# Altium PCB opus.PcbDoc
Units mm, origin at the board's own origin, x right, y up, seen from the top; angles counter-clockwise.
Board outline 42.88 x 39.05 mm, 2 copper layers (Top Layer, Bottom Layer), stack 0.976 mm thick; 10 components, 8 nets, 26 pads, 0 vias.
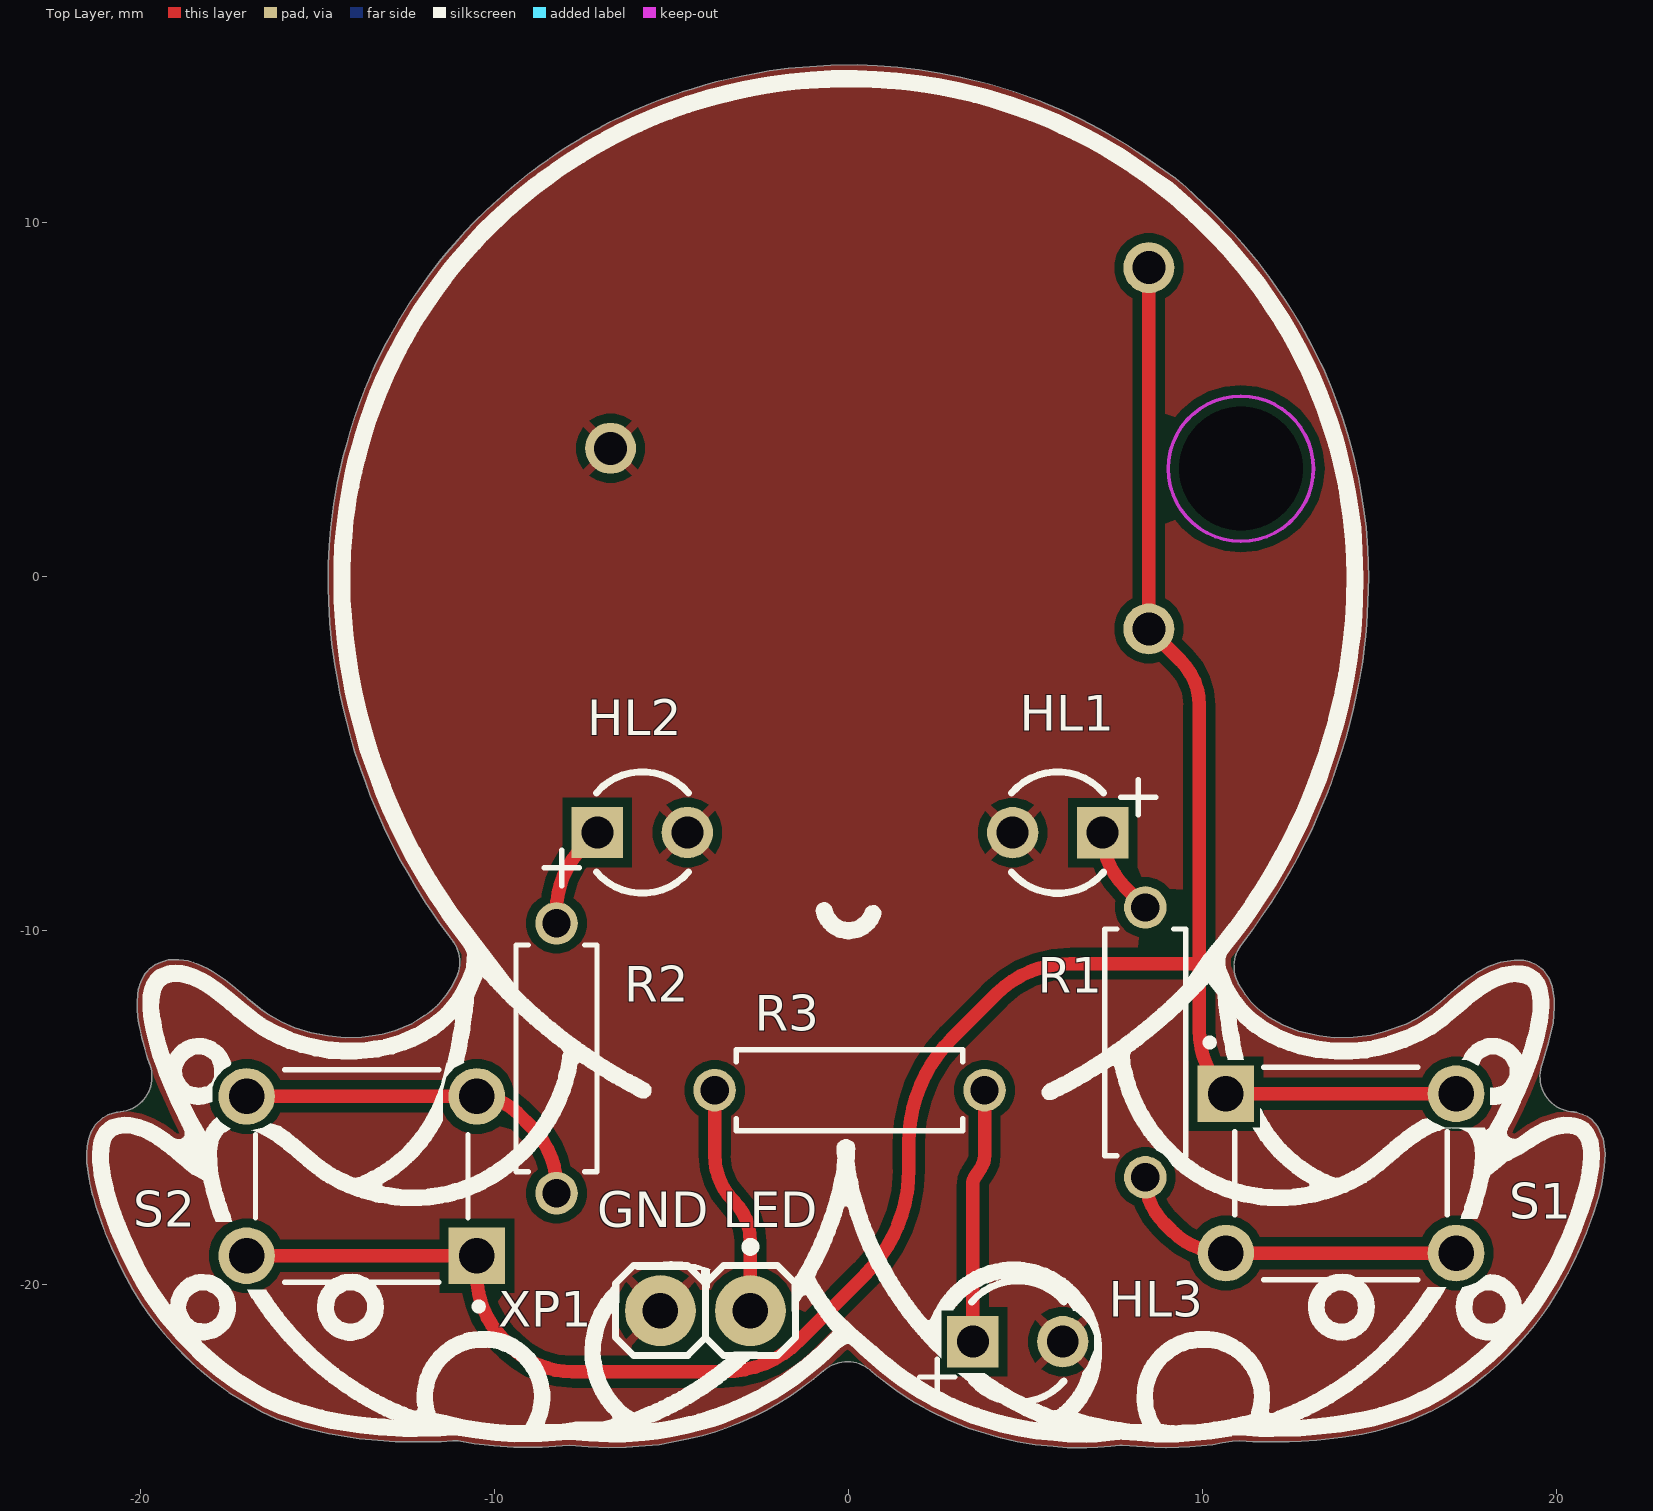
[diagram p0: Top Layer view]
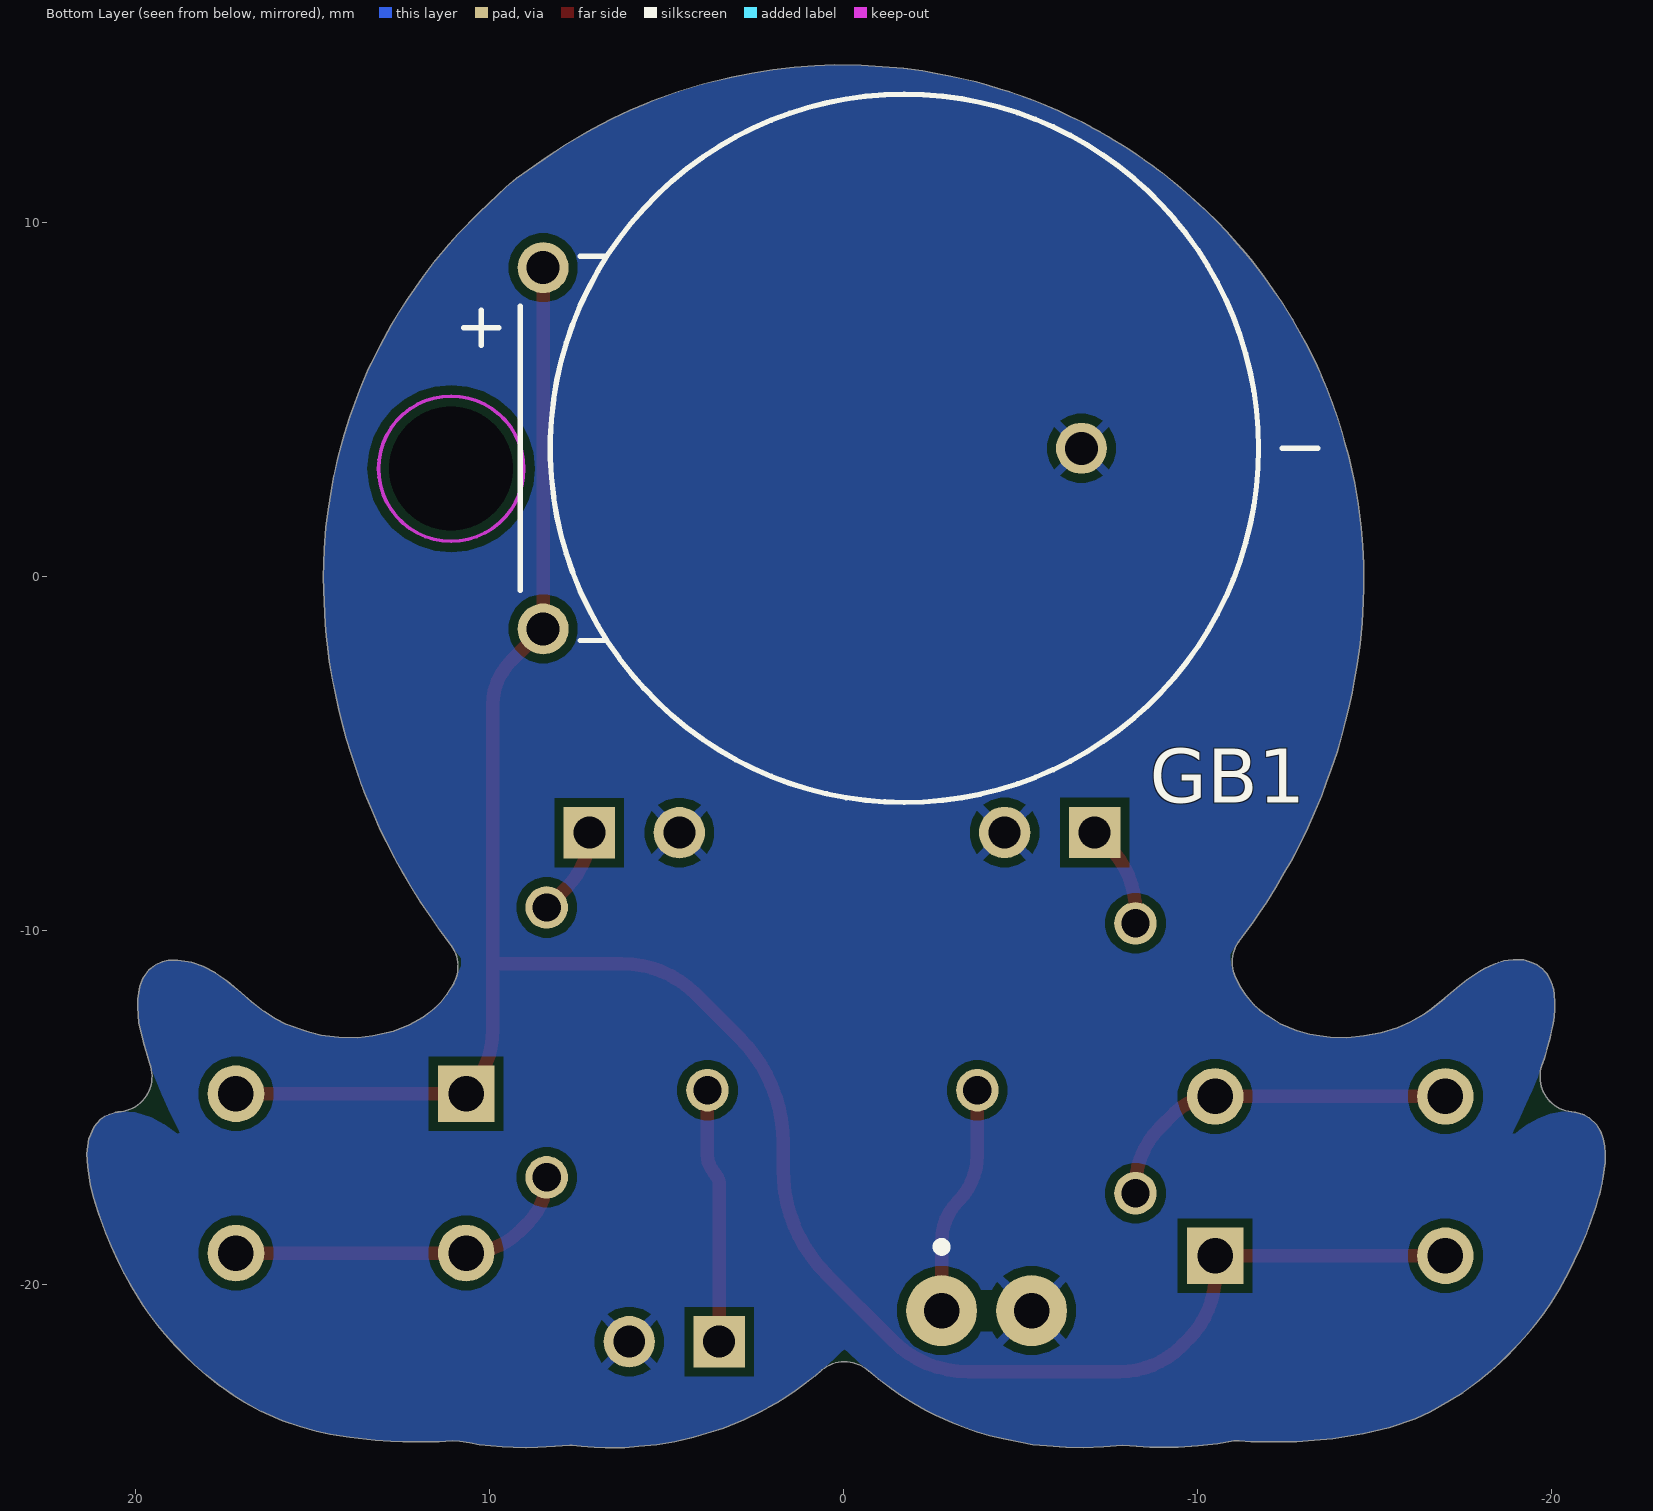
[diagram p1: Bottom Layer view, seen from below]

## Layer stack, top to bottom
Top Solder: solder mask 0.0102, Solder Resist, Dk 3.5
Top Layer: signal copper 0.018
Dielectric 1: dielectric 0.94, FR-4, Dk 4.8
Bottom Layer: signal copper 0.018
Bottom Solder: solder mask 0.0102, Solder Resist, Dk 3.5

## Board outline
395 vertices, not listed, extent -21.514,-24.6 21.362,14.454

## Design rules (kind name [scope] priority, off if disabled: settings)
Clearance [All] p1: gap=0.25 ignorepadtopadclearanceinfootprint=FALSE
HoleSize [All] p1: absolutevalues=TRUE maxlimit=4 minlimit=0.025 maxpercent=80.000 minpercent=20.000
PolygonConnect [All] p1: connectstyle=Relief reliefconductorwidth=0.25 reliefentries=4 polygonreliefangle="90 Angle" conductorbypadedge=TRUE mindistance=0.381 enablemindistance=FALSE airgapwidth=0.25
RoutingVias [All] p1: holewidth=0.711 width=1.27 viastyle="Through Hole" minholewidth=0.711 minwidth=1.27 maxholewidth=0.711 maxwidth=1.27
SilkToSilkClearance [All] p1: silktosilkclearance=0.02
SilkToSolderMaskClearance [IsPad] p1: minsilkscreentomaskgap=0.15 clearancetoexposedcopper=TRUE
SolderMaskExpansion [All] p1: expansion=0.102 istentingtop=FALSE
SupplyNets "Schematic Supply Nets_1" [InNet('GND')] p1: voltage=0.000
SupplyNets "Schematic Supply Nets" [InNet('3V')] p2: voltage=0.000
Width [All] p1: maxlimit=1 minlimit=0.3 preferedwidth=0.3
27 further rules are at their usual default settings.

## Classes and differential pairs
component class Octo: GB1 HL3 R1 R2 R3 S1 S2 XP1

## Components (designator, comment, footprint, x,y, rotation, side; value= is the part's Value field where it differs from the comment)
GB1 "CR2032-VAY3-15.2" CR2032-VAY3-15.2 -1.725,3.625 r180 bottom
HL1 "LED" 3mm_led_red 5.9,-7.225 r180 top locked
HL2 "LED" 3mm_led_red -5.825,-7.225 r0 top locked
HL3 "LED" 3mm_led_red 4.775,-21.6 r0 top
R1 "Resistor" RES_THT_025W_220 8.375,-13.15 r90 top value=220
R2 "Resistor" RES_THT_025W_220 -8.25,-13.6 r90 top value=220
R3 "Resistor" RES_THT_025W_220 0.025,-14.5 r0 top value=220
S1 "Tact_button" Button_tht_6X6 13.9,-16.85 r0 top
S2 "Tact_button" Button_tht_6X6 -13.75,-16.925 r180 top
XP1 "PLS-2" PLS2 -2.775,-20.725 r270 top

## Footprints (in the part's own frame and the unit in brackets; to place one, negate y for a bottom-side part, rotate by r counter-clockwise, add the part's x,y. Pads: shape width x height; smd on the part's side, far side on the other; paste and mask are expansions set on the pad)
3mm_led_red [mm]
  rect 1.45x1.45 hole 0.9 paste-2539.97 mask+0: 1(-1.27,0.001)
  round 1.45 hole 0.9 paste-2539.97 mask+0: 2(1.27,0.001)
  silkscreen extent -2.78,-1.71 1.3,1.71, body extent -1.92,-1.92 1.65,1.92, height 5.3
Button_tht_6X6 [mm]
  rect 1.6x1.6 / inner round 1.6 / far side rect 1.6x1.6 hole 1: 1(-3.25,2.25)
  round 1.6 hole 1: 1(3.25,2.25) 2(-3.25,-2.25) 2(3.25,-2.25)
  silkscreen extent -3.81,-3 3,3.8, body extent -3.95,-3 3.95,3, height 6
CR2032-VAY3-15.2 [mm]
  round 1.438 hole 0.93: N(5,0) P(-10.2,-5.1) P(-10.2,5.1)
  silkscreen extent -10.85,-10 11.67,10, body extent -10.35,-10 9.95,10, height 5.1
PLS2 [mm]
  round 2 hole 1: 1(0,0) 2(0,-2.54)
  silkscreen extent -1.92,-3.81 1.27,1.27, body extent -1.27,-3.81 1.27,1.27, height 8.44
RES_THT_025W_220 [mm]
  round 1.2 hole 0.8: 1(-3.81,0) 2(3.81,0)
  silkscreen extent -3.2,-1.14 3.2,1.14, body extent -4.06,-1.16 4.06,1.16, height 2.87

## Part data
GB1: "Li, MnO2 батарея типоразмера R20, 3В, 0.22Ач, приваренные выводы, -20...60 °C", Part Number=CR2032-VAY3-15.2
HL1 HL2 HL3: "Светодиод", Color={Цвет}, Part Number=LED
R1 R2 R3: library part Resistor_220_1_0603, "Резистор номиналом 220 Ом и точностью 1%", Tolerance=1%, Part Number=Resistor_220_1_0603
S1 S2: "Тактовая кнопка", Part Number=Tact_button
XP1: "Гребенка 2 пина", Value1={Value1}, Value2={Value2}, Part Number=PLS-2, System=Connector

## Free pads (board coordinates)
  round 0 hole 3.5 unplated mask-2539.97: 0(11.075,3.05)

## Nets (pads, with @x,y where several pads share a name; then routed paths per layer and width w, separated by ;. In a path a pad name is that pad's centre, name@x,y a point inside that pad or via, vN(x,y) a via of type N, cw(c..) or ccw(c..) an arc to the next point about the centre after c; other vN are vias at no path point)
3V: GB1.P S1.1 S2.1 | length 66.1
  Top Layer w0.381: S2.1@-17,-19.175 -10.5,-19.175 -10.5,-19.723 ccw(c-7.96,-19.723) -9.756,-21.519 -9.55,-21.725 ccw(c-7.8,-19.975) -7.8,-22.45 -3.521,-22.45 ccw(c-3.52,-19.445) -1.395,-21.57 0.464,-19.711 ; 0.465,-19.71 ccw(c-2.518,-16.728) 1.7,-16.727 1.7,-15.986 1.7,-15.985 cw(c5.888,-15.985) 2.925,-13.025 4.158,-11.792 cw(c6.252,-13.887) 6.252,-10.925 9.9,-10.925 ; GB1.P@8.475,8.725 8.475,-1.475 9.381,-2.381 cw(c8.128,-3.634) 9.9,-3.634 9.9,-10.925 ; S1.1@17.15,-14.6 10.65,-14.6 10.644,-14.594 cw(c12.44,-12.798) 9.9,-12.798 9.9,-10.925
GND: GB1.N HL1.2 HL2.2 HL3.2 XP1.2
NetHL1_1: HL1.1 R1.2 | length 2.5
  Top Layer w0.381: HL1.1 ccw(c9.364,-7.226) 7.812,-8.777 R1.2
NetHL2_1: HL2.1 R2.2 | length 2.9
  Top Layer w0.381: R2.2 -8.25,-9.431 cw(c-5.71,-9.431) -7.506,-7.635 HL2.1
NetHL3_1: HL3.1 R3.2 | length 7.2
  Top Layer w0.381: HL3.1 3.505,-17.152 cw(c3.886,-17.152) 3.57,-16.939 3.727,-16.707 ccw(c3.203,-16.353) 3.835,-16.353 R3.2
NetR1_1: R1.1 S1.2 | length 9.9
  Top Layer w0.381: R1.1 ccw(c10.222,-16.96) 8.915,-18.265 9.115,-18.465 ccw(c10.65,-16.927) 10.65,-19.1 S1.2@17.15,-19.1
NetR2_1: R2.1 S2.2 | length 10.4
  Top Layer w0.381: S2.2@-17,-14.675 -10.5,-14.675 cw(c-10.5,-16.317) -9.341,-15.154 -8.941,-15.554 cw(c-10.633,-17.24) R2.1
NetR3_1: R3.1 XP1.1 | length 6.5
  Top Layer w0.381: R3.1 -3.785,-16.333 ccw(c-1.958,-16.333) -3.25,-17.625 cw(c-4.397,-18.772) -2.775,-18.772 XP1.1

## Polygon pours and split planes (outlines as drawn)
no net on Top Overlay "NONET_L-01_P-001" (solid): 8.707,-16.205 8.865,-16.289 9.008,-16.437 9.14,-16.625 9.276,-16.439 9.14,-16.126 8.915,-16.1
no net on Top Overlay "NONET_L-01_P-001" (solid): 17.411,-13.627 17.592,-13.711 17.744,-13.8 17.794,-13.802 17.86,-13.629 17.638,-13.461 17.472,-13.494
no net on Top Overlay "NONET_L-01_P-001" (solid): 16.191,-15.321 16.332,-15.291 16.475,-15.398 16.843,-15.564 16.604,-15.65 15.97,-15.673 16.1,-15.391
no net on Top Overlay "NONET_L-01_P-001" (solid): 18.107,-19.702 17.989,-19.724 17.898,-19.803 17.714,-19.933 17.523,-20.006 17.329,-20.069 17.458,-20.202 18.042,-20.111 18.362,-20.022 18.233,-19.736
no net on Top Overlay "NONET_L-01_P-001" (solid): 6.598,-22.474 6.735,-22.301 6.928,-21.833 7.071,-21.902 7.003,-22.544 6.609,-22.597
no net on Top Overlay "NONET_L-01_P-001" (solid): 6.333,-20.724 6.412,-20.745 6.49,-20.809 6.651,-20.961 6.796,-21.129 6.876,-21.278 6.927,-21.435 7.049,-21.322 6.968,-20.922 6.92,-20.784 6.884,-20.716 6.777,-20.522 6.5,-20.5
no net on Top Overlay "NONET_L-01_P-001" (solid): -17.958,-19.719 -17.846,-19.781 -17.736,-19.838 -17.64,-19.917 -17.525,-20.022 -17.434,-20.13 -17.441,-20.212 -17.658,-20.22 -17.999,-20.172 -18.007,-19.726
no net on Top Overlay "NONET_L-01_P-001" (solid): -17.965,-13.719 -17.93,-13.809 -17.916,-13.903 -17.914,-14.006 -17.92,-14.117 -17.961,-14.211 -17.955,-14.394 -17.908,-14.243 -17.818,-14.088 -17.649,-13.913 -17.495,-13.823 -17.449,-13.777 -17.44,-13.719 -17.75,-13.5
no net on Top Overlay "NONET_L-01_P-001" (solid): -17.45,-15.594 -17.636,-15.472 -17.743,-15.386 -17.842,-15.267 -17.961,-15.357 -18.006,-15.611 -17.93,-15.714 -17.601,-15.682
no net on Top Overlay "NONET_L-01_P-001" (solid): -16.871,-15.631 -16.546,-15.562 -16.317,-15.434 -16.039,-15.512 -15.968,-15.726 -16.502,-15.702
no net on Top Overlay "NONET_L-01_P-001" (solid): -11.344,-13.725 -11.453,-14.105 -11.453,-14.454 -11.36,-14.116 -11.144,-13.872 -10.861,-13.726 -11.124,-13.607
GND on Top Layer "GND_L01_P000" (solid, pour order 0): 424 vertices, not listed, extent -21.514,-24.6 21.362,14.454
GND on Bottom Layer "GND_L02_P001" (solid, pour order 1): 424 vertices, not listed, extent -21.514,-24.6 21.362,14.454

## Keep-outs
Keep-Out Layer:
  circle w0.1: c11.075,3.05 r2.05

## Silkscreen, mask and mechanical layers (free items; w line width, h text height)
Top Overlay:
  drawing of 457 lines, arcs and shapes, not listed
  text "GND" at -7.1,-18.375 h1
  text "LED" at -3.55,-18.375 h1
Bottom Overlay:
  lines w0.1: 10.225,7.525 10.225,7.025 10.725,7.025
  lines w0.15: 9.725,7.025 10.725,7.025 ; 10.225,6.525 10.225,7.525
Top Solder:
  drawing of 37 lines, arcs and shapes, not listed
  text "vk.com/hydronautics" at -10.796,-1.663 h1
Bottom Solder:
  circle w1.8: c11.075,3.05 r0.9
Mechanical 4:
  drawing of 384 lines, arcs and shapes, not listed